# EAGLE board RAMPS (EAGLE 6.3), part 1 of 3
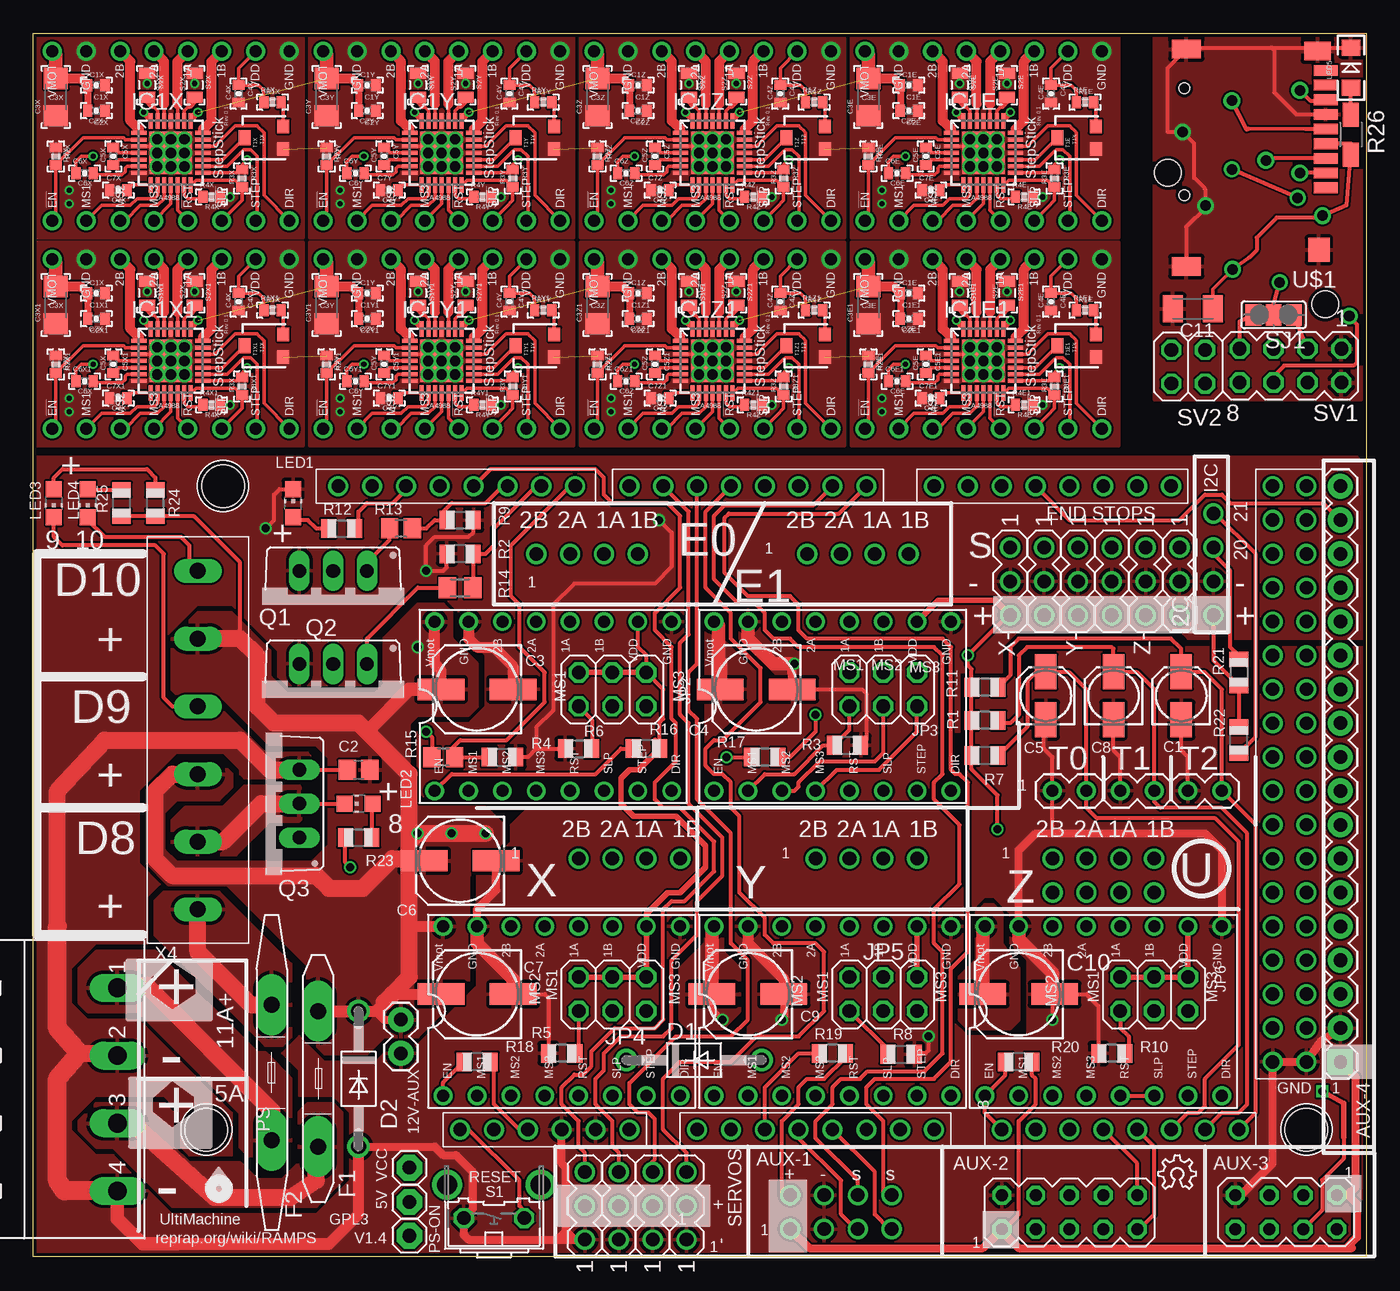
[diagram p0: board, top side]
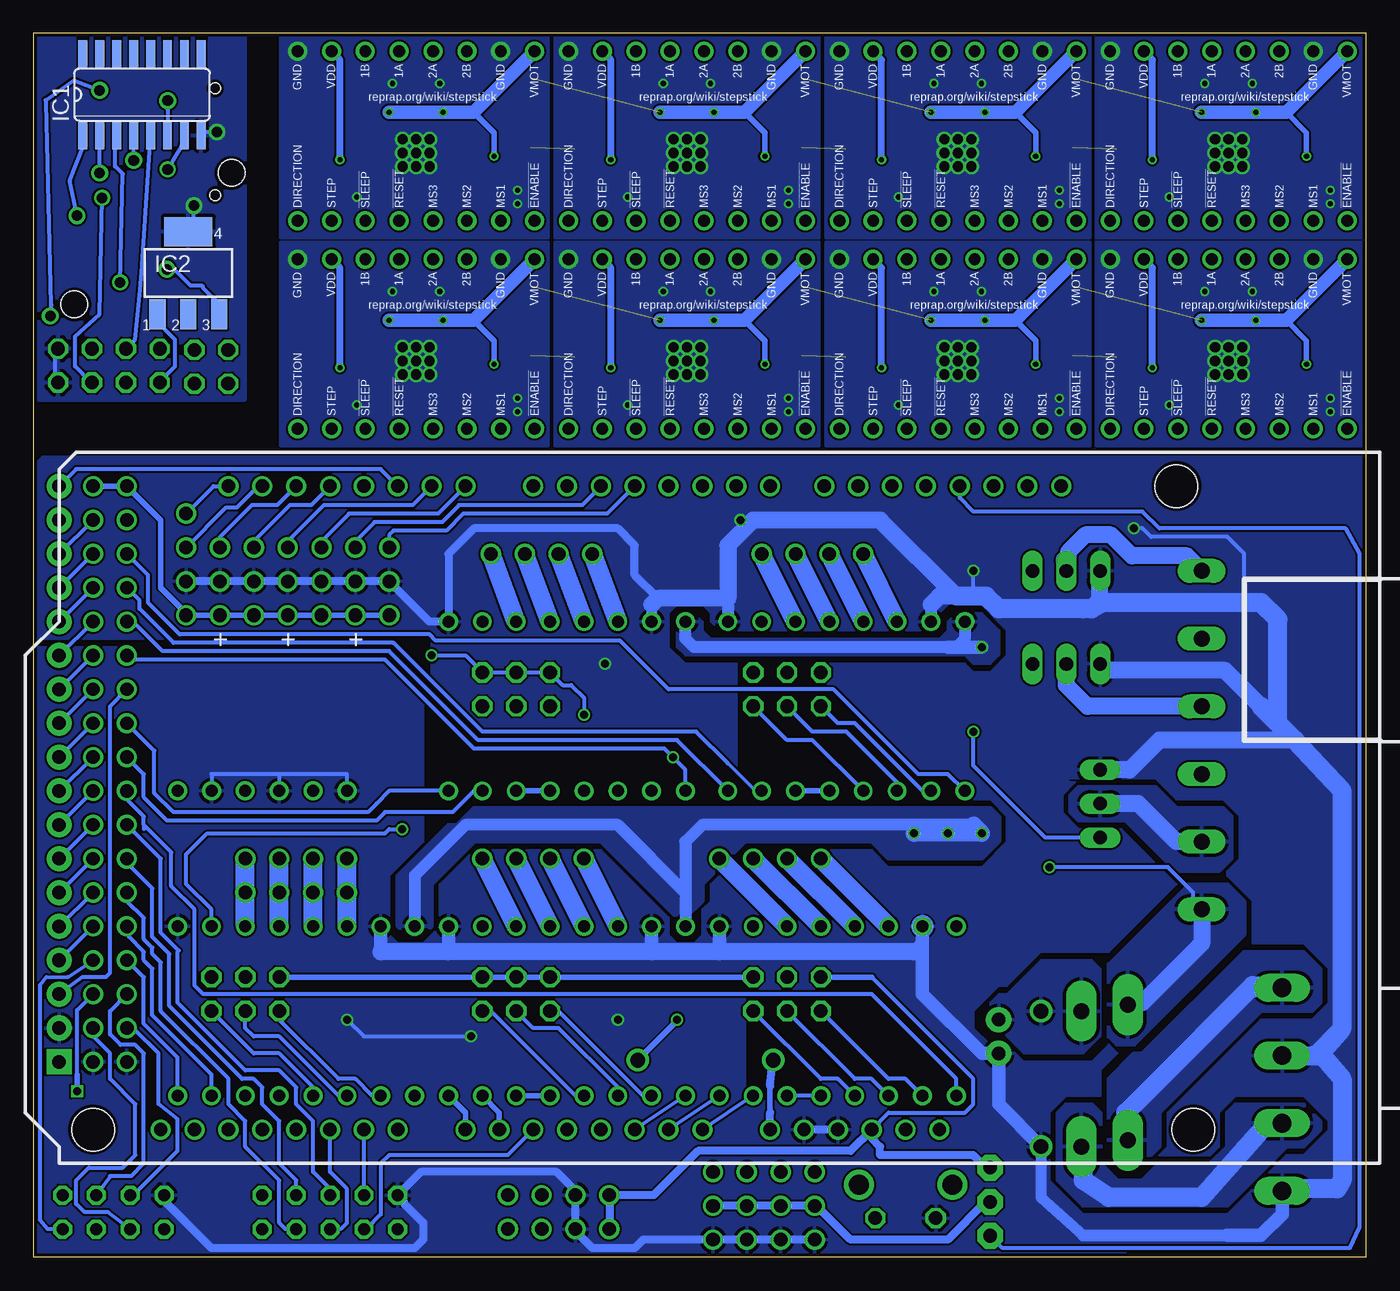
[diagram p1: board, bottom side, seen from below]

Size 100 x 91.75 mm. Coordinates in mm from the lower left corner, seen from the top.
Outline: 0,91.75 100,91.75 100,0 0,0 0,91.75
Copper layers (1*16): Top 0.035mm / dielectric 1.5mm / Bottom 0.035mm
Design rules "ITead_rule": minimum track width 6mil, minimum drill 12mil, track to track 6mil, track to pad 6mil, pad to pad 6mil, via to via 6mil, smd to smd 0mil, copper to edge 10mil, drill to drill 10mil, minimum pad ring 10mil, minimum via ring 6mil, stop-mask expansion 2mil, vias tented up to drill 100mil, thermal gap 10mil
Holes 2 mm at 85.12,81.27 96.92,71.42

## Footprints (pad centres in the part's own frame; a part is rotated, then mirrored left to right if it is on the bottom)
1X01 = drill 1.016 pad 1.93 octagon: 1 0,0
1X02 = drill 1.016 pad 1.88: 1 0,0; 2 2.54,0
1X04 = drill 1.016: 1 -2.54,0; 2 0,0; 3 2.54,0; 4 5.08,0
153CLV-0405 = smd 2.6 x 1.6: + 1.8,0; - -1.8,0
0402-CAP = smd 0.7 x 0.9: 1 -0.65,0; 2 0.65,0
C0805 = smd 1.3 x 1.5: 1 -0.85,0; 2 0.85,0
153CLV-0605 = smd 3.5 x 1.6: + 2.7,0; - -2.7,0
1206 = smd 1.6 x 1.8: 1 -1.4,0; 2 1.4,0
C1206K = smd 1.5 x 2: 1 -1.5,0; 2 1.5,0
DO41-10 = drill 1.118: A 5.08,0; C -5.08,0
MFR500 = drill 1.2 pad 2.3 long: 1 -5.08,0; 2 5.08,0
MFR1100 = drill 1.2 pad 2.3 long: 1 -5.08,0; 2 5.08,0
SO16 = smd 0.66 x 2.032: 1 -4.445,-3.073; 2 -3.175,-3.073; 3 -1.905,-3.073; 4 -0.635,-3.073; 5 0.635,-3.073; 6 1.905,-3.073; 7 3.175,-3.073; 8 4.445,-3.073; 9 4.445,3.073; 10 3.175,3.073; 11 1.905,3.073; 12 0.635,3.073; 13 -0.635,3.073; 14 -1.905,3.073; 15 -3.175,3.073; 16 -4.445,3.073
QFN28ET = smd 1.15 x 0.3: 1 -2.4,1.5; 2 -2.4,1; 3 -2.4,0.5; 4 -2.4,0; 5 -2.4,-0.5; 6 -2.4,-1; 7 -2.4,-1.5; 15 2.4,-1.5; 16 2.4,-1; 17 2.4,-0.5; 18 2.4,0; 19 2.4,0.5; 20 2.4,1; 21 2.4,1.5 | smd 0.3 x 1.15: 8 -1.5,-2.4; 9 -1,-2.4; 10 -0.5,-2.4; 11 0,-2.4; 12 0.5,-2.4; 13 1,-2.4; 14 1.5,-2.4; 22 1.5,2.4; 23 1,2.4; 24 0.5,2.4; 25 0,2.4; 26 -0.5,2.4; 27 -1,2.4; 28 -1.5,2.4 | smd 3.15 x 3.15: EXP 0,0
SOT223 = smd 1.219 x 2.235: 1 -2.311,-3.099; 2 0,-3.099; 3 2.311,-3.099 | smd 3.6 x 2.2: 4 0,3.099
CLONOLU = drill 0.889 pad 1.422: 1A 6.35,-1.27; 1B 6.35,-3.81; 2A 6.35,1.27; 2B 6.35,3.81; !EN -6.35,8.89; !RST -6.35,-1.27; !SLP -6.35,-3.81; DIR -6.35,-8.89; GND$1 6.35,6.35; GND$2 6.35,-8.89; MS1 -6.35,6.35; MS2 -6.35,3.81; MS3 -6.35,1.27; STEP -6.35,-6.35; VDD 6.35,-6.35; VMOT 6.35,8.89
2X03 = drill 1.016 octagon: 1 -2.54,-1.27; 2 -2.54,1.27; 3 0,-1.27; 4 0,1.27; 5 2.54,-1.27; 6 2.54,1.27
1X06 = drill 0.9 pad 1.422: 1 0,0; 2 2.54,0; 3 5.08,0; 4 7.62,0; 5 10.16,0; 6 12.7,0
CHIP-LED0805 = smd 1.2 x 1.2: A 0,-1.05; C 0,1.05
LED-1206 = smd 1.2 x 1.4: A -1.5,0; C 1.5,0
TO220BV = drill 1.016 long: D 0,-2.54; G -2.54,-2.54; S 2.54,-2.54
R0805 = smd 1.1 x 1.4: 1 -1,0; 2 1,0
0402-RES = smd 0.7 x 0.9: 1 -0.65,0; 2 0.65,0
R0805' = smd 1.3 x 1.5: 1 -0.85,0; 2 0.85,0
M0805 = smd 1.3 x 1.6: 1 -0.95,0; 2 0.95,0
R1206W = smd 1.8 x 1.2: 1 -1.499,0; 2 1.499,0
B3F-31XX = drill 1.016 octagon: 1 -2.261,-1.245; 2 2.261,-1.245 | drill 1.499 pad 2.159: 3 -3.505,1.245; 4 3.505,1.245
0805 = smd 0.8 x 1.2: 1 -0.9,0; 2 0.9,0
3PIN-HEADER = drill 1.016: 1 -2.54,0; 2 0,0; 3 2.54,0
SJ_2 = smd 1.168 x 1.6: 1 -1.524,0; 2 0,0; 3 1.524,0
MA04-2 = drill 1.016 octagon: 1 -3.81,-1.27; 2 -3.81,1.27; 3 -1.27,-1.27; 4 -1.27,1.27; 5 1.27,-1.27; 6 1.27,1.27; 7 3.81,-1.27; 8 3.81,1.27
2X02 = drill 1.016 octagon: 1 -1.27,-1.27; 2 -1.27,1.27; 3 1.27,-1.27; 4 1.27,1.27
TRIMPOT-3MM = smd 1 x 0.9: 1 -0.85,-1.45; 3 0.85,-1.45 | smd 1.1 x 0.9: 2 0,1.45
ARDUINO_MEGA_SHIELD = drill 1 pad 1.422: 3.3V 35.56,2.54; 5V@0 38.1,2.54; 5V@1 93.98,50.8; 5V@2 96.52,50.8; A0 50.8,2.54; A1 53.34,2.54; A2 55.88,2.54; A3 58.42,2.54; A4 60.96,2.54; A5 63.5,2.54; A6 66.04,2.54; A7 68.58,2.54; A8 73.66,2.54; A9 76.2,2.54; A10 78.74,2.54; A11 81.28,2.54; A12 83.82,2.54; A13 86.36,2.54; A14 88.9,2.54; A15 91.44,2.54; AREF 23.876,50.8; D2 58.42,50.8; D3 55.88,50.8; D4 53.34,50.8; D5 50.8,50.8; D6 48.26,50.8; D7 45.72,50.8; D8 41.656,50.8; D9 39.116,50.8; D10 36.576,50.8; D11 34.036,50.8; D12 31.496,50.8; D13 28.956,50.8; D14 68.58,50.8; D15 71.12,50.8; D16 73.66,50.8; D17 76.2,50.8; D18 78.74,50.8; D19 81.28,50.8; D20 83.82,50.8; D21 86.36,50.8; D22 93.98,48.26; D23 96.52,48.26; D24 93.98,45.72; D25 96.52,45.72; D26 93.98,43.18; D27 96.52,43.18; D28 93.98,40.64; D29 96.52,40.64; D30 93.98,38.1; D31 96.52,38.1; D32 93.98,35.56; D33 96.52,35.56; D34 93.98,33.02; D35 96.52,33.02; D36 93.98,30.48; D37 96.52,30.48; D38 93.98,27.94; D39 96.52,27.94; D40 93.98,25.4; D41 96.52,25.4; D42 93.98,22.86; D43 96.52,22.86; D44 93.98,20.32; D45 96.52,20.32; D46 93.98,17.78; D47 96.52,17.78; D48 93.98,15.24; D49 96.52,15.24; D50 93.98,12.7; D51 96.52,12.7; D52 93.98,10.16; D53 96.52,10.16; GND@0 40.64,2.54; GND@1 43.18,2.54; GND@2 26.416,50.8; GND@3 93.98,7.62; GND@4 96.52,7.62; RES 33.02,2.54; RX 63.5,50.8; TX 60.96,50.8; VIN 45.72,2.54 | hole 3.2: 96.52,2.54; 13.97,2.54; 15.24,50.8
MICROSD_PP = smd 1.8 x 0.8: 1 0,3.85; 2 0,2.75; 3 0,1.65; 4 0,0.55; 5 0,-0.55; 6 0,-1.65; 7 0,-2.75; 8 0,-3.85; 9 0,-4.95 | smd 1.6 x 1.8: GND@1 0.5,8.5 | smd 2.2 x 1.4: GND@2 10.45,9.75; GND@4 10.45,-6.55 | smd 2 x 1.4: GND@3 0.6,-6.4 | hole 0.8: 10.6,4.4; 10.6,-3.6
282837-6 = drill 1.2 long: P$1 0,-12.7; P$2 0,-7.62; P$3 0,-2.54; P$4 0,2.54; P$5 0,7.62; P$6 0,12.7
2X4 = drill 0.9 pad 1.422 octagon: 1 -3.81,-1.27; 2 -3.81,1.27; 3 -1.27,-1.27; 4 -1.27,1.27; 5 1.27,-1.27; 6 1.27,1.27; 7 3.81,-1.27; 8 3.81,1.27
A4988BREAKOUT = drill 0.9: 1A 8.89,1.27; 1B 11.43,1.27; 2A 6.35,1.27; 2B 3.81,1.27; DIR 16.51,-11.43; EN -1.27,-11.43; GND 16.51,1.27; GND@0 1.27,1.27; MS1 1.27,-11.43; MS2 3.81,-11.43; MS3 6.35,-11.43; RST 8.89,-11.43; SLP 11.43,-11.43; STEP 13.97,-11.43; VDD 13.97,1.27; VMOT -1.27,1.27
1X18 = drill 1.016 pad 1.88 square: 1 0,0 | drill 1.016 pad 1.88: 2 2.54,0; 3 5.08,0; 4 7.62,0; 5 10.16,0; 6 12.7,0; 7 15.24,0; 8 17.78,0; 9 20.32,0; 10 22.86,0; 11 25.4,0; 12 27.94,0; 13 30.48,0; 14 33.02,0; 15 35.56,0; 16 38.1,0; 17 40.64,0; 18 43.18,0
2X5 = drill 0.9 pad 1.422 octagon: 1 -3.81,-1.27; 2 -3.81,1.27; 3 -1.27,-1.27; 4 -1.27,1.27; 5 1.27,-1.27; 6 1.27,1.27; 7 3.81,-1.27; 8 3.81,1.27; 9 6.35,-1.27; 10 6.35,1.27
MSTBA4 = drill 1.397 long: 1 -7.62,5.08; 2 -2.54,5.08; 3 2.54,5.08; 4 7.62,5.08

## Placement (x,y rotation side)
5V  [1X01]  28.21,4.1 0 top
12V-AUX  [1X02]  27.57,17.78 270 top
A-OUT  [1X04]  59.33,4.6 0 top
C1  10uF  [153CLV-0405]  86.12,42.06 90 top
C1E  .1uf  [0402-CAP]  65.69,87.86 180 top
C1E1  .1uf  [0402-CAP]  65.69,72.26 180 top
C1X  .1uf  [0402-CAP]  4.73,87.86 180 top
C1X1  .1uf  [0402-CAP]  4.73,72.26 180 top
C1Y  .1uf  [0402-CAP]  25.05,87.86 180 top
C1Y1  .1uf  [0402-CAP]  25.05,72.26 180 top
C1Z  .1uf  [0402-CAP]  45.37,87.86 180 top
C1Z1  .1uf  [0402-CAP]  45.37,72.26 180 top
C2  100nF  [C0805]  24.4,36.51 180 top
C2E  .1uf  [0402-CAP]  65.69,85.95 180 top
C2E1  .1uf  [0402-CAP]  65.69,70.35 180 top
C2X  .1uf  [0402-CAP]  4.73,85.95 180 top
C2X1  .1uf  [0402-CAP]  4.73,70.35 180 top
C2Y  .1uf  [0402-CAP]  25.05,85.95 180 top
C2Y1  .1uf  [0402-CAP]  25.05,70.35 180 top
C2Z  .1uf  [0402-CAP]  45.37,85.95 180 top
C2Z1  .1uf  [0402-CAP]  45.37,70.35 180 top
C3  100uF  [153CLV-0605]  33.29,42.54 180 top
C3E  4.7uF  [1206]  62.64,86.97 90 top
C3E1  4.7uF  [1206]  62.64,71.37 90 top
C3X  4.7uF  [1206]  1.68,86.97 90 top
C3X1  4.7uF  [1206]  1.68,71.37 90 top
C3Y  4.7uF  [1206]  22,86.97 90 top
C3Y1  4.7uF  [1206]  22,71.37 90 top
C3Z  4.7uF  [1206]  42.32,86.97 90 top
C3Z1  4.7uF  [1206]  42.32,71.37 90 top
C4  100uF  [153CLV-0605]  54.24,42.54 180 top
C4E  .22uf  [0402-CAP]  76.36,87.22 270 top
C4E1  .22uf  [0402-CAP]  76.36,71.62 270 top
C4X  .22uf  [0402-CAP]  15.4,87.22 270 top
C4X1  .22uf  [0402-CAP]  15.4,71.62 270 top
C4Y  .22uf  [0402-CAP]  35.72,87.22 270 top
C4Y1  .22uf  [0402-CAP]  35.72,71.62 270 top
C4Z  .22uf  [0402-CAP]  56.04,87.22 270 top
C4Z1  .22uf  [0402-CAP]  56.04,71.62 270 top
C5  10uF  [153CLV-0405]  75.96,42.06 90 top
C5E  .1uf  [0402-CAP]  66.96,82.52 270 top
C5E1  .1uf  [0402-CAP]  66.96,66.92 270 top
C5X  .1uf  [0402-CAP]  6,82.52 270 top
C5X1  .1uf  [0402-CAP]  6,66.92 270 top
C5Y  .1uf  [0402-CAP]  26.32,82.52 270 top
C5Y1  .1uf  [0402-CAP]  26.32,66.92 270 top
C5Z  .1uf  [0402-CAP]  46.64,82.52 270 top
C5Z1  .1uf  [0402-CAP]  46.64,66.92 270 top
C6  100uF  [153CLV-0605]  32.02,29.69 180 top
C6E  .1uf  [0402-CAP]  64.8,81.25 0 top
C6E1  .1uf  [0402-CAP]  64.8,65.65 0 top
C6X  .1uf  [0402-CAP]  3.84,81.25 0 top
C6X1  .1uf  [0402-CAP]  3.84,65.65 0 top
C6Y  .1uf  [0402-CAP]  24.16,81.25 0 top
C6Y1  .1uf  [0402-CAP]  24.16,65.65 0 top
C6Z  .1uf  [0402-CAP]  44.48,81.25 0 top
C6Z1  .1uf  [0402-CAP]  44.48,65.65 0 top
C7  100uF  [153CLV-0605]  33.29,19.69 180 top
C7E  .22uf  [0402-CAP]  67.34,79.98 0 top
C7E1  .22uf  [0402-CAP]  67.34,64.38 0 top
C7X  .22uf  [0402-CAP]  6.38,79.98 0 top
C7X1  .22uf  [0402-CAP]  6.38,64.38 0 top
C7Y  .22uf  [0402-CAP]  26.7,79.98 0 top
C7Y1  .22uf  [0402-CAP]  26.7,64.38 0 top
C7Z  .22uf  [0402-CAP]  47.02,79.98 0 top
C7Z1  .22uf  [0402-CAP]  47.02,64.38 0 top
C8  10uF  [153CLV-0405]  81.04,42.06 90 top
C9  100uF  [153CLV-0605]  53.61,19.69 180 top
C10  100uF  [153CLV-0605]  73.93,19.69 180 top
C11  [C1206K]  87,71.09 180 top
D1  1N4004  [DO41-10]  49.57,14.73 0 top
D2  1N4004  [DO41-10]  24.4,13.33 270 top
E0-MOT  [1X04]  40.27,52.7 0 top
E1-MOT  [1X04]  60.59,52.7 0 top
F1  MFR500  [MFR500]  21.38,13.33 270 top
F2  MFR1100  [MFR1100]  17.89,13.81 90 top
I2C  [1X04]  88.53,50.64 90 top
IC1  4050D  [SO16]  91.84,87.15 0 bottom
IC1E  A4988  [QFN28ET]  71.28,82.78 0 top
IC1E1  A4988  [QFN28ET]  71.28,67.18 0 top
IC1X  A4988  [QFN28ET]  10.32,82.78 0 top
IC1X1  A4988  [QFN28ET]  10.32,67.18 0 top
IC1Y  A4988  [QFN28ET]  30.64,82.78 0 top
IC1Y1  A4988  [QFN28ET]  30.64,67.18 0 top
IC1Z  A4988  [QFN28ET]  50.96,82.78 0 top
IC1Z1  A4988  [QFN28ET]  50.96,67.18 0 top
IC2  LM340MP-05  [SOT223]  88.38,73.77 0 bottom
J1E  CLONOLU  [CLONOLU]  71.28,84.05 90 top
J1E1  CLONOLU  [CLONOLU]  71.28,68.45 90 top
J1X  CLONOLU  [CLONOLU]  10.32,84.05 90 top
J1X1  CLONOLU  [CLONOLU]  10.32,68.45 90 top
J1Y  CLONOLU  [CLONOLU]  30.64,84.05 90 top
J1Y1  CLONOLU  [CLONOLU]  30.64,68.45 90 top
J1Z  CLONOLU  [CLONOLU]  50.96,84.05 90 top
J1Z1  CLONOLU  [CLONOLU]  50.96,68.45 90 top
JP2  [2X03]  43.45,42.54 0 top
JP3  [2X03]  63.77,42.54 0 top
JP4  [2X03]  43.45,19.69 0 top
JP5  [2X03]  63.77,19.69 0 top
JP6  [2X03]  84.09,19.69 0 top
JP7  [1X06]  76.47,34.92 0 top
LED1  [CHIP-LED0805]  19.48,56.51 0 top
LED2  [CHIP-LED0805]  24.4,33.97 90 top
LED3  [CHIP-LED0805]  1.54,56.51 180 top
LED4  [CHIP-LED0805]  4.08,56.51 180 top
LED5  [LED-1206]  98.85,89.17 90 top
LOGO1  OSHW_LOGO_6MILX0100-NT  [OSHW_6X100_NOTEXT]  84.41,5.08 0 top
PS-ON  [1X01]  28.21,1.56 0 top
Q1  STP55NF06L  [TO220BV]  22.49,48.89 180 top
Q2  STP55NF06L  [TO220BV]  22.49,41.91 180 top
Q3  STP55NF06L  [TO220BV]  17.42,33.97 90 top
R1  4.7K  [R0805]  71.39,40.22 180 top
R1E  20k  [0402-RES]  78.9,86.59 0 top
R1E1  20k  [0402-RES]  78.9,70.98 0 top
R1X  20k  [0402-RES]  17.94,86.59 0 top
R1X1  20k  [0402-RES]  17.94,70.98 0 top
R1Y  20k  [0402-RES]  38.26,86.59 0 top
R1Y1  20k  [0402-RES]  38.26,70.98 0 top
R1Z  20k  [0402-RES]  58.58,86.59 0 top
R1Z1  20k  [0402-RES]  58.58,70.98 0 top
R2  100k  [R0805]  32.02,52.7 180 top
R2E  100k  [0402-RES]  62.64,82.52 270 top
R2E1  100k  [0402-RES]  62.64,66.92 270 top
R2X  100k  [0402-RES]  1.68,82.52 270 top
R2X1  100k  [0402-RES]  1.68,66.92 270 top
R2Y  100k  [0402-RES]  22,82.52 270 top
R2Y1  100k  [0402-RES]  22,66.92 270 top
R2Z  100k  [0402-RES]  42.32,82.52 270 top
R2Z1  100k  [0402-RES]  42.32,66.92 270 top
R3  100k  [R0805]  61.08,38.35 0 top
R3E  100k  [0402-RES]  76.61,80.87 270 top
R3E1  100k  [0402-RES]  76.61,65.27 270 top
R3X  100k  [0402-RES]  15.65,80.87 270 top
R3X1  100k  [0402-RES]  15.65,65.27 270 top
R3Y  100k  [0402-RES]  35.97,80.87 270 top
R3Y1  100k  [0402-RES]  35.97,65.27 270 top
R3Z  100k  [0402-RES]  56.29,80.87 270 top
R3Z1  100k  [0402-RES]  56.29,65.27 270 top
R4  100k  [R0805]  35.2,37.46 0 top
R4E  10k  [0402-RES]  74.33,79.47 0 top
R4E1  10k  [0402-RES]  74.33,63.87 0 top
R4X  10k  [0402-RES]  13.37,79.47 0 top
R4X1  10k  [0402-RES]  13.37,63.87 0 top
R4Y  10k  [0402-RES]  33.69,79.47 0 top
R4Y1  10k  [0402-RES]  33.69,63.87 0 top
R4Z  10k  [0402-RES]  54.01,79.47 0 top
R4Z1  10k  [0402-RES]  54.01,63.87 0 top
R5  100k  [R0805]  39.64,15.24 180 top
R6  100k  [R0805]  40.91,38.1 0 top
R7  4.7K  [R0805]  71.39,37.58 180 top
R8  100k  [R0805]  65.1,15.18 0 top
R9  100k  [R0805]  32.02,55.24 0 top
R10  100k  [R0805]  80.92,15.24 180 top
R11  4.7K  [R0805]  71.39,42.7 180 top
R12  1K  [R0805]  23.13,54.61 0 top
R13  10r  [R0805']  27.57,54.61 180 top
R14  10r  [M0805]  32.02,50.16 180 top
R15  10r  [R0805']  30.75,37.46 180 top
R16  10k  [R0805]  45.99,38.1 180 top
R17  10k  [R0805]  54.88,37.46 180 top
R18  10k  [R0805]  33.29,14.6 180 top
R19  10k  [R0805]  59.96,15.24 180 top
R20  10k  [R0805]  73.93,14.6 180 top
R21  4.7K  [R0805]  90.44,43.81 270 top
R22  4.7K  [R0805]  90.44,38.73 90 top
R23  1.8K  [R0805]  24.4,31.43 0 top
R24  1.8K  [R0805]  9.16,56.51 90 top
R25  1.8K  [R0805]  6.62,56.51 90 top
R26  [R1206W]  98.85,84.14 270 top
S1  [B3F-31XX]  34.56,4.13 0 top
S1E  0.2  [0805]  69.5,87.86 270 top
S1E1  0.2  [0805]  69.5,72.26 270 top
S1X  0.2  [0805]  8.54,87.86 270 top
S1X1  0.2  [0805]  8.54,72.26 270 top
S1Y  0.2  [0805]  28.86,87.86 270 top
S1Y1  0.2  [0805]  28.86,72.26 270 top
S1Z  0.2  [0805]  49.18,87.86 270 top
S1Z1  0.2  [0805]  49.18,72.26 270 top
S2E  0.2  [0805]  73.06,87.86 270 top
S2E1  0.2  [0805]  73.06,72.26 270 top
S2X  0.2  [0805]  12.1,87.86 270 top
S2X1  0.2  [0805]  12.1,72.26 270 top
S2Y  0.2  [0805]  32.42,87.86 270 top
S2Y1  0.2  [0805]  32.42,72.26 270 top
S2Z  0.2  [0805]  52.74,87.86 270 top
S2Z1  0.2  [0805]  52.74,72.26 270 top
SER1  [3PIN-HEADER]  41.39,3.81 90 top
SER2  [3PIN-HEADER]  43.93,3.81 90 top
SER3  [3PIN-HEADER]  46.47,3.81 90 top
SER4  [3PIN-HEADER]  49.01,3.81 90 top
SERIAL  [1X04]  59.33,2.06 0 top
SJ1  [SJ_2]  93.06,70.63 180 top
SV1  [MA04-2]  94.33,66.82 180 top
SV2  [2X02]  86.65,66.74 180 top
T1E  TRIM  [TRIMPOT-3MM]  78.27,83.92 90 top
T1E1  TRIM  [TRIMPOT-3MM]  78.27,68.32 90 top
T1X  TRIM  [TRIMPOT-3MM]  17.3,83.92 90 top
T1X1  TRIM  [TRIMPOT-3MM]  17.3,68.32 90 top
T1Y  TRIM  [TRIMPOT-3MM]  37.62,83.92 90 top
T1Y1  TRIM  [TRIMPOT-3MM]  37.62,68.32 90 top
T1Z  TRIM  [TRIMPOT-3MM]  57.95,83.92 90 top
T1Z1  TRIM  [TRIMPOT-3MM]  57.95,68.32 90 top
U1  ARDUINO_MEGA_SHIELD  [ARDUINO_MEGA_SHIELD]  -1,6.98 0 top
U$1  MICROSD_PP  [MICROSD_PP]  96.95,84.01 180 top
U$2  282837-6  [282837-6]  12.34,38.73 0 top
U$3  M04X2  [2X4]  94,3.33 180 top
U$4  A4988BREAKOUT  [A4988BREAKOUT]  31.38,46.35 0 top
U$5  A4988BREAKOUT  [A4988BREAKOUT]  52.34,46.35 0 top
U$6  A4988BREAKOUT  [A4988BREAKOUT]  32.02,23.49 0 top
U$7  A4988BREAKOUT  [A4988BREAKOUT]  52.34,23.49 0 top
U$8  A4988BREAKOUT  [A4988BREAKOUT]  72.66,23.49 0 top
U$9  M18_  [1X18]  98.06,14.6 90 top
U$10  M05X2  [2X5]  76.47,3.33 0 top
VCC  [1X01]  28.21,6.67 0 top
X4  MSTBA4  [MSTBA4]  1.22,12.54 270 top
X+  [3PIN-HEADER]  75.83,50.64 270 top
X-  [3PIN-HEADER]  73.3,50.64 270 top
X-MOT  [1X04]  43.45,29.84 0 top
Y+  [3PIN-HEADER]  80.92,50.64 270 top
Y-  [3PIN-HEADER]  78.38,50.64 270 top
Y-MOT  [1X04]  61.23,29.84 0 top
Z+  [3PIN-HEADER]  86,50.64 270 top
Z-  [3PIN-HEADER]  83.45,50.64 270 top
Z-MOT  [1X04]  79.01,29.84 0 top
Z-MOT1  [1X04]  79.01,27.3 0 top

## Library data of the parts
5V C1 C3-C10 PS-ON R1-R12 R16-R25 VCC = adafruit
12V-AUX C1E C1E1 C1X C1X1 C1Y C1Y1 C1Z C1Z1 C2E C2E1 C2X C2X1 C2Y C2Y1 C2Z C2Z1 C3E C3E1 C3X C3X1 C3Y C3Y1 C3Z C3Z1 C4E C4E1 C4X C4X1 C4Y C4Y1 C4Z C4Z1 C5E C5E1 C5X C5X1 C5Y C5Y1 C5Z C5Z1 C6E C6E1 C6X C6X1 C6Y C6Y1 C6Z C6Z1 C7E C7E1 C7X C7X1 C7Y C7Y1 C7Z C7Z1 JP7 LED5 R1E R1E1 R1X R1X1 R1Y R1Y1 R1Z R1Z1 R2E R2E1 R2X R2X1 R2Y R2Y1 R2Z R2Z1 R3E R3E1 R3X R3X1 R3Y R3Y1 R3Z R3Z1 R4E R4E1 R4X R4X1 R4Y R4Y1 R4Z R4Z1 S1E S1E1 S1X S1X1 S1Y S1Y1 S1Z S1Z1 S2E S2E1 S2X S2X1 S2Y S2Y1 S2Z S2Z1 SJ1 T1E T1E1 T1X T1X1 T1Y T1Y1 T1Z T1Z1 U$3 U$9 = SparkFun
A-OUT E0-MOT E1-MOT F1 F2 I2C SERIAL U1 U$2 U$4-U$8 U$10 X-MOT Y-MOT Z-MOT Z-MOT1 = RepRapjr
C2 R13-R15 = resistor
C11 R26 = rcl
D1 D2 = diode
IC1 = 40xx
IC1E IC1E1 IC1X IC1X1 IC1Y IC1Y1 IC1Z IC1Z1 = allegro; MPN: A4983SETTR-T; OC_FARNELL: 1688956; OC_NEWARK: 39M6763
IC2 = linear
J1E J1E1 J1X J1X1 J1Y J1Y1 J1Z J1Z1 = pololu-allegro
JP2-JP6 SV2 = pinhead
LED1-LED4 = led
LOGO1 = OSHW
Q1-Q3 = transistor-power
S1 = switch-omron; MPN: B3F-3100; OC_FARNELL: 959704; OC_NEWARK: 36M3582
SER1-SER4 X+ X- Y+ Y- Z+ Z- = ultimachine
SV1 = con-lstb; OC_FARNELL: unknown; OC_NEWARK: unknown
U$1 = DE1594
X4 = con-phoenix-508

## Nets
+5V: 5V.1 SER1.2 SER2.2 SER3.2 SER4.2
+12V: 12V-AUX.1 C2.1 C3.+ C4.+ C6.+ C7.+ C9.+ C10.+ D1.A D2.C F1.1 R24.1 R25.1 U$2.P$3 U$2.P$5 U$4.VMOT U$5.VMOT U$6.VMOT U$7.VMOT U$8.VMOT
+12V2: F2.2 R23.1 U$2.P$1
A3: SERIAL.3 U1.A3
A4: SERIAL.4 U1.A4
A5: U1.A5 U$10.3
A9: U1.A9 U$10.4
A10: U1.A10 U$10.5
A11: U1.A11 U$10.10
A12: U1.A12 U$10.9
AM-VIN: D1.C U1.VIN
D1: A-OUT.4 U1.RX
D2: A-OUT.3 U1.TX
D4: SER4.3 U1.D4
D5: SER3.3 U1.D5
D6: SER2.3 U1.D6
D8: R4.1 R15.1 U1.D8
D9: R2.1 R14.1 U1.D9
D10: R9.1 R13.1 U1.D10
D11: SER1.3 U1.D11
D12: PS-ON.1 U1.D12
D16: U1.D16 U$9.18
D17: U1.D17 U$9.17
D23: U1.D23 U$9.16
D25: U1.D25 U$9.15
D27: U1.D27 U$9.14
D29: U1.D29 U$9.13
D31: U1.D31 U$9.12
D32: U1.D32 U$9.3
D33: U1.D33 U$9.11
D35: U1.D35 U$9.10
D37: U1.D37 U$9.9
D39: U1.D39 U$9.8
D40: U1.D40 U$10.6
D41: U1.D41 U$9.7
D42: U1.D42 U$10.8
D43: U1.D43 U$9.6
D44: U1.D44 U$10.7
D45: U1.D45 U$9.5
D47: U1.D47 U$9.4
D49: U1.D49 U$3.2
D53: U1.D53 U$3.6
E0-DIR: U1.D28 U$4.DIR
E0-EN: R16.2 U1.D24 U$4.EN
E0-STEP: U1.D26 U$4.STEP
E1-DIR: U1.D34 U$5.DIR
E1-EN: R17.2 U1.D30 U$5.EN
E1-STEP: U1.D36 U$5.STEP
ECP1: C5E.1 IC1E.4
ECP2: C5E.2 IC1E.5
ECP3: C5E1.1 IC1E1.4
ECP4: C5E1.2 IC1E1.5
EDIR: IC1E.19 J1E.DIR
EDIR1: IC1E1.19 J1E1.DIR
EENABLE: IC1E.2 J1E.!EN R2E.2
EENABLE1: IC1E1.2 J1E1.!EN R2E1.2
EMS1: IC1E.9 J1E.MS1
EMS2: IC1E.10 J1E.MS2
EMS3: IC1E.11 J1E.MS3
EMS4: IC1E1.9 J1E1.MS1
EMS5: IC1E1.10 J1E1.MS2
EMS6: IC1E1.11 J1E1.MS3
EOUT1A: IC1E.24 J1E.1A
EOUT1A1: IC1E1.24 J1E1.1A
EOUT1B: IC1E.21 J1E.1B
EOUT1B1: IC1E1.21 J1E1.1B
EOUT2A: IC1E.26 J1E.2A
EOUT2A1: IC1E1.26 J1E1.2A
EOUT2B: IC1E.1 J1E.2B
EOUT2B1: IC1E1.1 J1E1.2B
EREF: IC1E.17 T1E.2
EREF1: IC1E1.17 T1E1.2
EREF2: R1E.2 T1E.3
EREF3: R1E1.2 T1E1.3
ERESET: IC1E.12 J1E.!RST
ERESET1: IC1E1.12 J1E1.!RST
EROSC: IC1E.13 R4E.1
EROSC1: IC1E1.13 R4E1.1
ESENSE1: IC1E.23 S2E.2
ESENSE2: IC1E.27 S1E.2
ESENSE3: IC1E1.27 S1E1.2
ESENSE4: IC1E1.23 S2E1.2
ESLEEP: IC1E.14 J1E.!SLP R3E.2
ESLEEP1: IC1E1.14 J1E1.!SLP R3E1.2
ESTEP: IC1E.16 J1E.STEP
ESTEP1: IC1E1.16 J1E1.STEP
EVCP: C6E.2 IC1E.6
EVCP1: C6E1.2 IC1E1.6
EVREG: C7E.2 IC1E.8
EVREG1: C7E1.2 IC1E1.8
GND: 12V-AUX.2 A-OUT.2 C1.- C2.2 C3.- C4.- C5.- C6.- C7.- C8.- C9.- C10.- D2.A I2C.2 JP7.1 JP7.3 JP7.5 LED1.C Q1.S Q2.S Q3.S R2.2 R3.2 R4.2 R5.2 R6.1 R8.2 R9.2 R10.2 S1.1 SER1.1 SER2.1 SER3.1 SER4.1 SERIAL.2 U1.GND@0 U1.GND@1 U1.GND@3 U1.GND@4 U$3.7 U$4.GND U$4.GND@0 U$5.GND U$5.GND@0 U$6.GND U$6.GND@0 U$7.GND U$7.GND@0 U$8.GND U$8.GND@0 U$9.2 U$10.2 X4.2 X4.4 X+.2 X-.2 Y+.2 Y-.2 Z+.2 Z-.2
GND1: C1E.1 C1X.1 C1Y.1 C1Z.1 C2E.1 C2X.1 C2Y.1 C2Z.1 C3E.1 C3X.1 C3Y.1 C3Z.1 C4E.2 C4X.2 C4Y.2 C4Z.2 C7E.1 C7X.1 C7Y.1 C7Z.1 IC1E.3 IC1E.7 IC1E.18 IC1E.20 IC1E.25 IC1E.EXP IC1X.3 IC1X.7 IC1X.18 IC1X.20 IC1X.25 IC1X.EXP IC1Y.3 IC1Y.7 IC1Y.18 IC1Y.20 IC1Y.25 IC1Y.EXP IC1Z.3 IC1Z.7 IC1Z.18 IC1Z.20 IC1Z.25 IC1Z.EXP J1E.GND$1 J1E.GND$2 J1X.GND$1 J1X.GND$2 J1Y.GND$1 J1Y.GND$2 J1Z.GND$1 J1Z.GND$2 R2E.1 R2X.1 R2Y.1 R2Z.1 R4E.2 R4X.2 R4Y.2 R4Z.2 S1E.1 S1X.1 S1Y.1 S1Z.1 S2E.1 S2X.1 S2Y.1 S2Z.1 T1E.1 T1X.1 T1Y.1 T1Z.1
GND2: C1E1.1 C1X1.1 C1Y1.1 C1Z1.1 C2E1.1 C2X1.1 C2Y1.1 C2Z1.1 C3E1.1 C3X1.1 C3Y1.1 C3Z1.1 C4E1.2 C4X1.2 C4Y1.2 C4Z1.2 C7E1.1 C7X1.1 C7Y1.1 C7Z1.1 IC1E1.3 IC1E1.7 IC1E1.18 IC1E1.20 IC1E1.25 IC1E1.EXP IC1X1.3 IC1X1.7 IC1X1.18 IC1X1.20 IC1X1.25 IC1X1.EXP IC1Y1.3 IC1Y1.7 IC1Y1.18 IC1Y1.20 IC1Y1.25 IC1Y1.EXP IC1Z1.3 IC1Z1.7 IC1Z1.18 IC1Z1.20 IC1Z1.25 IC1Z1.EXP J1E1.GND$1 J1E1.GND$2 J1X1.GND$1 J1X1.GND$2 J1Y1.GND$1 J1Y1.GND$2 J1Z1.GND$1 J1Z1.GND$2 R2E1.1 R2X1.1 R2Y1.1 R2Z1.1 R4E1.2 R4X1.2 R4Y1.2 R4Z1.2 S1E1.1 S1X1.1 S1Y1.1 S1Z1.1 S2E1.1 S2X1.1 S2Y1.1 S2Z1.1 T1E1.1 T1X1.1 T1Y1.1 T1Z1.1
GND3: C11.2 IC1.8 IC2.4 LED5.C SV1.1 SV1.2 U$1.6 U$1.GND@1 U$1.GND@2 U$1.GND@3 U$1.GND@4
LED: R12.2 U1.D13
MISO: U1.D50 U$3.3
MOSI: U1.D51 U$3.4
N$1: LED3.C Q2.D U$2.P$4
N$2: IC1.2 U$1.2
N$3: E0-MOT.1 U$4.2B
N$4: E0-MOT.2 U$4.2A
N$5: JP2.1 R6.2 U$4.MS1
N$6: JP2.5 U$4.MS3
N$7: LED4.C Q1.D U$2.P$6
N$8: U$4.RST U$4.SLP
N$9: JP2.3 U$4.MS2
N$10: E0-MOT.3 U$4.1A
N$11: E0-MOT.4 U$4.1B
N$12: E1-MOT.1 U$5.2B
N$13: E1-MOT.2 U$5.2A
N$14: JP4.1 R5.1 U$6.MS1
N$15: JP4.3 U$6.MS2
N$16: E1-MOT.3 U$5.1A
N$17: JP5.3 U$7.MS2
N$18: E1-MOT.4 U$5.1B
N$19: JP4.5 U$6.MS3
N$20: U$6.RST U$6.SLP
N$21: U$6.2B X-MOT.1
N$22: U$6.2A X-MOT.2
N$23: U$7.RST U$7.SLP
N$24: U$5.RST U$5.SLP
N$25: JP3.1 R3.1 U$5.MS1
N$26: U$6.1A X-MOT.3
N$27: U$6.1B X-MOT.4
N$28: U$7.2B Y-MOT.1
N$29: U$7.2A Y-MOT.2
N$30: U$7.1A Y-MOT.3
N$31: JP5.5 U$7.MS3
N$32: LED2.A R23.2
N$33: JP5.1 R8.1 U$7.MS1
N$34: JP3.5 U$5.MS3
N$35: JP3.3 U$5.MS2
N$36: U$7.1B Y-MOT.4
N$37: JP6.3 U$8.MS2
N$38: U$8.RST U$8.SLP
N$39: JP6.5 U$8.MS3
N$40: JP6.1 R10.1 U$8.MS1
N$41: U$8.2B Z-MOT1.1 Z-MOT.1
N$42: U$8.2A Z-MOT1.2 Z-MOT.2
N$43: U$8.1A Z-MOT1.3 Z-MOT.3
N$44: U$8.1B Z-MOT1.4 Z-MOT.4
N$45: LED3.A R24.2
N$46: LED1.A R12.1
N$47: Q2.G R14.2
N$48: Q1.G R13.2
N$49: Q3.G R15.2
N$50: LED4.A R25.2
N$51: LED2.C Q3.D U$2.P$2
N$52: IC1.4 U$1.3
N$53: F2.1 X4.1
N$54: F1.2 X4.3
N$55: IC1.6 U$1.5
N$56: SV1.6 U$1.7
N$57: IC1.7 SV1.4
N$58: IC1.5 SV1.5
N$59: SJ1.3 SV1.7
N$60: IC1.3 SJ1.1 SJ1.2 SV1.3
N$61: IC2.1 SV1.8
N$62: LED5.A R26.1
RESET: S1.2 U1.RES
SCK: U1.D52 U$3.5
SCL: I2C.4 R22.1 U1.D21
SDA: I2C.3 R21.1 U1.D20
THERM0: C5.+ JP7.2 R7.1 U1.A13
THERM1: C8.+ JP7.4 R1.1 U1.A14
THERM2: C1.+ JP7.6 R11.1 U1.A15
VCC: A-OUT.1 I2C.1 JP2.2 JP2.4 JP2.6 JP3.2 JP3.4 JP3.6 JP4.2 JP4.4 JP4.6 JP5.2 JP5.4 JP5.6 JP6.2 JP6.4 JP6.6 R1.2 R7.2 R11.2 R16.1 R17.1 R18.1 R19.1 R20.1 R21.2 R22.2 SERIAL.1 U1.5V@0 U1.5V@1 U1.5V@2 U$3.1 U$4.VDD U$5.VDD U$6.VDD U$7.VDD U$8.VDD U$9.1 U$10.1 VCC.1 X+.3 X-.3 Y+.3 Y-.3 Z+.3 Z-.3
VCC1: C11.1 IC1.1 IC2.3 R26.2 U$1.4
VDD: C4E.1 C4X.1 C4Y.1 C4Z.1 IC1E.15 IC1X.15 IC1Y.15 IC1Z.15 J1E.VDD J1X.VDD J1Y.VDD J1Z.VDD R1E.1 R1X.1 R1Y.1 R1Z.1 R3E.1 R3X.1 R3Y.1 R3Z.1
VDD1: C4E1.1 C4X1.1 C4Y1.1 C4Z1.1 IC1E1.15 IC1X1.15 IC1Y1.15 IC1Z1.15 J1E1.VDD J1X1.VDD J1Y1.VDD J1Z1.VDD R1E1.1 R1X1.1 R1Y1.1 R1Z1.1 R3E1.1 R3X1.1 R3Y1.1 R3Z1.1
VMOT: C1E.2 C1X.2 C1Y.2 C1Z.2 C2E.2 C2X.2 C2Y.2 C2Z.2 C3E.2 C3X.2 C3Y.2 C3Z.2 C6E.1 C6X.1 C6Y.1 C6Z.1 IC1E.22 IC1E.28 IC1X.22 IC1X.28 IC1Y.22 IC1Y.28 IC1Z.22 IC1Z.28 J1E.VMOT J1X.VMOT J1Y.VMOT J1Z.VMOT
VMOT1: C1E1.2 C1X1.2 C1Y1.2 C1Z1.2 C2E1.2 C2X1.2 C2Y1.2 C2Z1.2 C3E1.2 C3X1.2 C3Y1.2 C3Z1.2 C6E1.1 C6X1.1 C6Y1.1 C6Z1.1 IC1E1.22 IC1E1.28 IC1X1.22 IC1X1.28 IC1Y1.22 IC1Y1.28 IC1Z1.22 IC1Z1.28 J1E1.VMOT J1X1.VMOT J1Y1.VMOT J1Z1.VMOT
X-DIR: U1.A1 U$6.DIR
X-EN: R18.2 U1.D38 U$6.EN
X-MAX: U1.D2 X+.1
X-MIN: U1.D3 X-.1
X-STEP: U1.A0 U$6.STEP
XCP1: C5X.1 IC1X.4
XCP2: C5X.2 IC1X.5
XCP3: C5X1.1 IC1X1.4
XCP4: C5X1.2 IC1X1.5
XDIR: IC1X.19 J1X.DIR
XDIR1: IC1X1.19 J1X1.DIR
XENABLE: IC1X.2 J1X.!EN R2X.2
XENABLE1: IC1X1.2 J1X1.!EN R2X1.2
XMS1: IC1X.9 J1X.MS1
XMS2: IC1X.10 J1X.MS2
XMS3: IC1X.11 J1X.MS3
XMS4: IC1X1.9 J1X1.MS1
XMS5: IC1X1.10 J1X1.MS2
XMS6: IC1X1.11 J1X1.MS3
XOUT1A: IC1X.24 J1X.1A
XOUT1A1: IC1X1.24 J1X1.1A
XOUT1B: IC1X.21 J1X.1B
XOUT1B1: IC1X1.21 J1X1.1B
XOUT2A: IC1X.26 J1X.2A
XOUT2A1: IC1X1.26 J1X1.2A
XOUT2B: IC1X.1 J1X.2B
XOUT2B1: IC1Y.1 J1Y.2B
XOUT2B2: IC1X1.1 J1X1.2B
XOUT2B3: IC1Y1.1 J1Y1.2B
XREF: IC1X.17 T1X.2
XREF1: IC1X1.17 T1X1.2
XREF2: R1X.2 T1X.3
XREF3: R1X1.2 T1X1.3
XRESET: IC1X.12 J1X.!RST
XRESET1: IC1X1.12 J1X1.!RST
XROSC: IC1X.13 R4X.1
XROSC1: IC1X1.13 R4X1.1
XSENSE1: IC1X.23 S2X.2
XSENSE2: IC1X.27 S1X.2
XSENSE3: IC1X1.27 S1X1.2
XSENSE4: IC1X1.23 S2X1.2
XSLEEP: IC1X.14 J1X.!SLP R3X.2
XSLEEP1: IC1X1.14 J1X1.!SLP R3X1.2
XSTEP: IC1X.16 J1X.STEP
XSTEP1: IC1X1.16 J1X1.STEP
XVCP: C6X.2 IC1X.6
XVCP1: C6X1.2 IC1X1.6
XVREG: C7X.2 IC1X.8
XVREG1: C7X1.2 IC1X1.8
Y-DIR: U1.A7 U$7.DIR
Y-EN: R19.2 U1.A2 U$7.EN
Y-MAX: U1.D15 Y+.1
Y-MIN: U1.D14 Y-.1
Y-STEP: U1.A6 U$7.STEP
YCP1: C5Y.1 IC1Y.4
YCP2: C5Y.2 IC1Y.5
YCP3: C5Y1.1 IC1Y1.4
YCP4: C5Y1.2 IC1Y1.5
YDIR1: IC1Y.19 J1Y.DIR
YDIR2: IC1Y1.19 J1Y1.DIR
YENABLE: IC1Y.2 J1Y.!EN R2Y.2
YENABLE1: IC1Y1.2 J1Y1.!EN R2Y1.2
YMS1: IC1Y.9 J1Y.MS1
YMS2: IC1Y.10 J1Y.MS2
YMS3: IC1Y.11 J1Y.MS3
YMS4: IC1Y1.9 J1Y1.MS1
YMS5: IC1Y1.10 J1Y1.MS2
YMS6: IC1Y1.11 J1Y1.MS3
YOUT1A: IC1Y.24 J1Y.1A
YOUT1A1: IC1Y1.24 J1Y1.1A
YOUT1B: IC1Y.21 J1Y.1B
YOUT1B1: IC1Y1.21 J1Y1.1B
YOUT2A: IC1Y.26 J1Y.2A
YOUT2A1: IC1Y1.26 J1Y1.2A
YREF: IC1Y.17 T1Y.2
YREF1: R1Y.2 T1Y.3
YREF2: IC1Y1.17 T1Y1.2
YREF3: R1Y1.2 T1Y1.3
YRESET: IC1Y.12 J1Y.!RST
YRESET1: IC1Y1.12 J1Y1.!RST
YROSC: IC1Y.13 R4Y.1
YROSC1: IC1Y1.13 R4Y1.1
YSENSE1: IC1Y.23 S2Y.2
YSENSE2: IC1Y.27 S1Y.2
YSENSE3: IC1Y1.27 S1Y1.2
YSENSE4: IC1Y1.23 S2Y1.2
YSLEEP: IC1Y.14 J1Y.!SLP R3Y.2
YSLEEP1: IC1Y1.14 J1Y1.!SLP R3Y1.2
YSTEP: IC1Y.16 J1Y.STEP
YSTEP1: IC1Y1.16 J1Y1.STEP
YVCP: C6Y.2 IC1Y.6
YVCP1: C6Y1.2 IC1Y1.6
YVREG: C7Y.2 IC1Y.8
YVREG1: C7Y1.2 IC1Y1.8
Z-DIR: U1.D48 U$8.DIR
Z-EN: R20.2 U1.A8 U$8.EN
Z-MAX: U1.D19 Z+.1
Z-MIN: U1.D18 Z-.1
Z-STEP: U1.D46 U$8.STEP
ZCP1: C5Z.1 IC1Z.4
ZCP2: C5Z.2 IC1Z.5
ZCP3: C5Z1.1 IC1Z1.4
ZCP4: C5Z1.2 IC1Z1.5
ZDIR: IC1Z.19 J1Z.DIR
ZDIR1: IC1Z1.19 J1Z1.DIR
ZENABLE: IC1Z.2 J1Z.!EN R2Z.2
ZENABLE1: IC1Z1.2 J1Z1.!EN R2Z1.2
ZMS1: IC1Z.9 J1Z.MS1
ZMS2: IC1Z.10 J1Z.MS2
ZMS3: IC1Z.11 J1Z.MS3
ZMS4: IC1Z1.9 J1Z1.MS1
ZMS5: IC1Z1.10 J1Z1.MS2
ZMS6: IC1Z1.11 J1Z1.MS3
ZOUT1A: IC1Z.24 J1Z.1A
ZOUT1A1: IC1Z1.24 J1Z1.1A
ZOUT1B: IC1Z.21 J1Z.1B
ZOUT1B1: IC1Z1.21 J1Z1.1B
ZOUT2A: IC1Z.26 J1Z.2A
ZOUT2A1: IC1Z1.26 J1Z1.2A
ZOUT2B: IC1Z.1 J1Z.2B
ZOUT2B1: IC1Z1.1 J1Z1.2B
ZREF: IC1Z.17 T1Z.2
ZREF1: IC1Z1.17 T1Z1.2
ZREF2: R1Z.2 T1Z.3
ZREF3: R1Z1.2 T1Z1.3
ZRESET: IC1Z.12 J1Z.!RST
ZRESET1: IC1Z1.12 J1Z1.!RST
ZROSC: IC1Z.13 R4Z.1
ZROSC1: IC1Z1.13 R4Z1.1
ZSENSE1: IC1Z.23 S2Z.2
ZSENSE2: IC1Z.27 S1Z.2
ZSENSE3: IC1Z1.27 S1Z1.2
ZSENSE4: IC1Z1.23 S2Z1.2
ZSLEEP: IC1Z.14 J1Z.!SLP R3Z.2
ZSLEEP1: IC1Z1.14 J1Z1.!SLP R3Z1.2
ZSTEP: IC1Z.16 J1Z.STEP
ZSTEP1: IC1Z1.16 J1Z1.STEP
ZVCP: C6Z.2 IC1Z.6
ZVCP1: C6Z1.2 IC1Z1.6
ZVREG: C7Z.2 IC1Z.8
ZVREG1: C7Z1.2 IC1Z1.8